# Altium PCB PCB1.PcbDoc
Units mil, origin at the board's own origin, x right, y up, seen from the top; angles counter-clockwise.
Board outline 4200 x 3205 mil, 2 copper layers (Top Layer, Bottom Layer); 8 components, 12 nets, 100 pads, 8 vias.
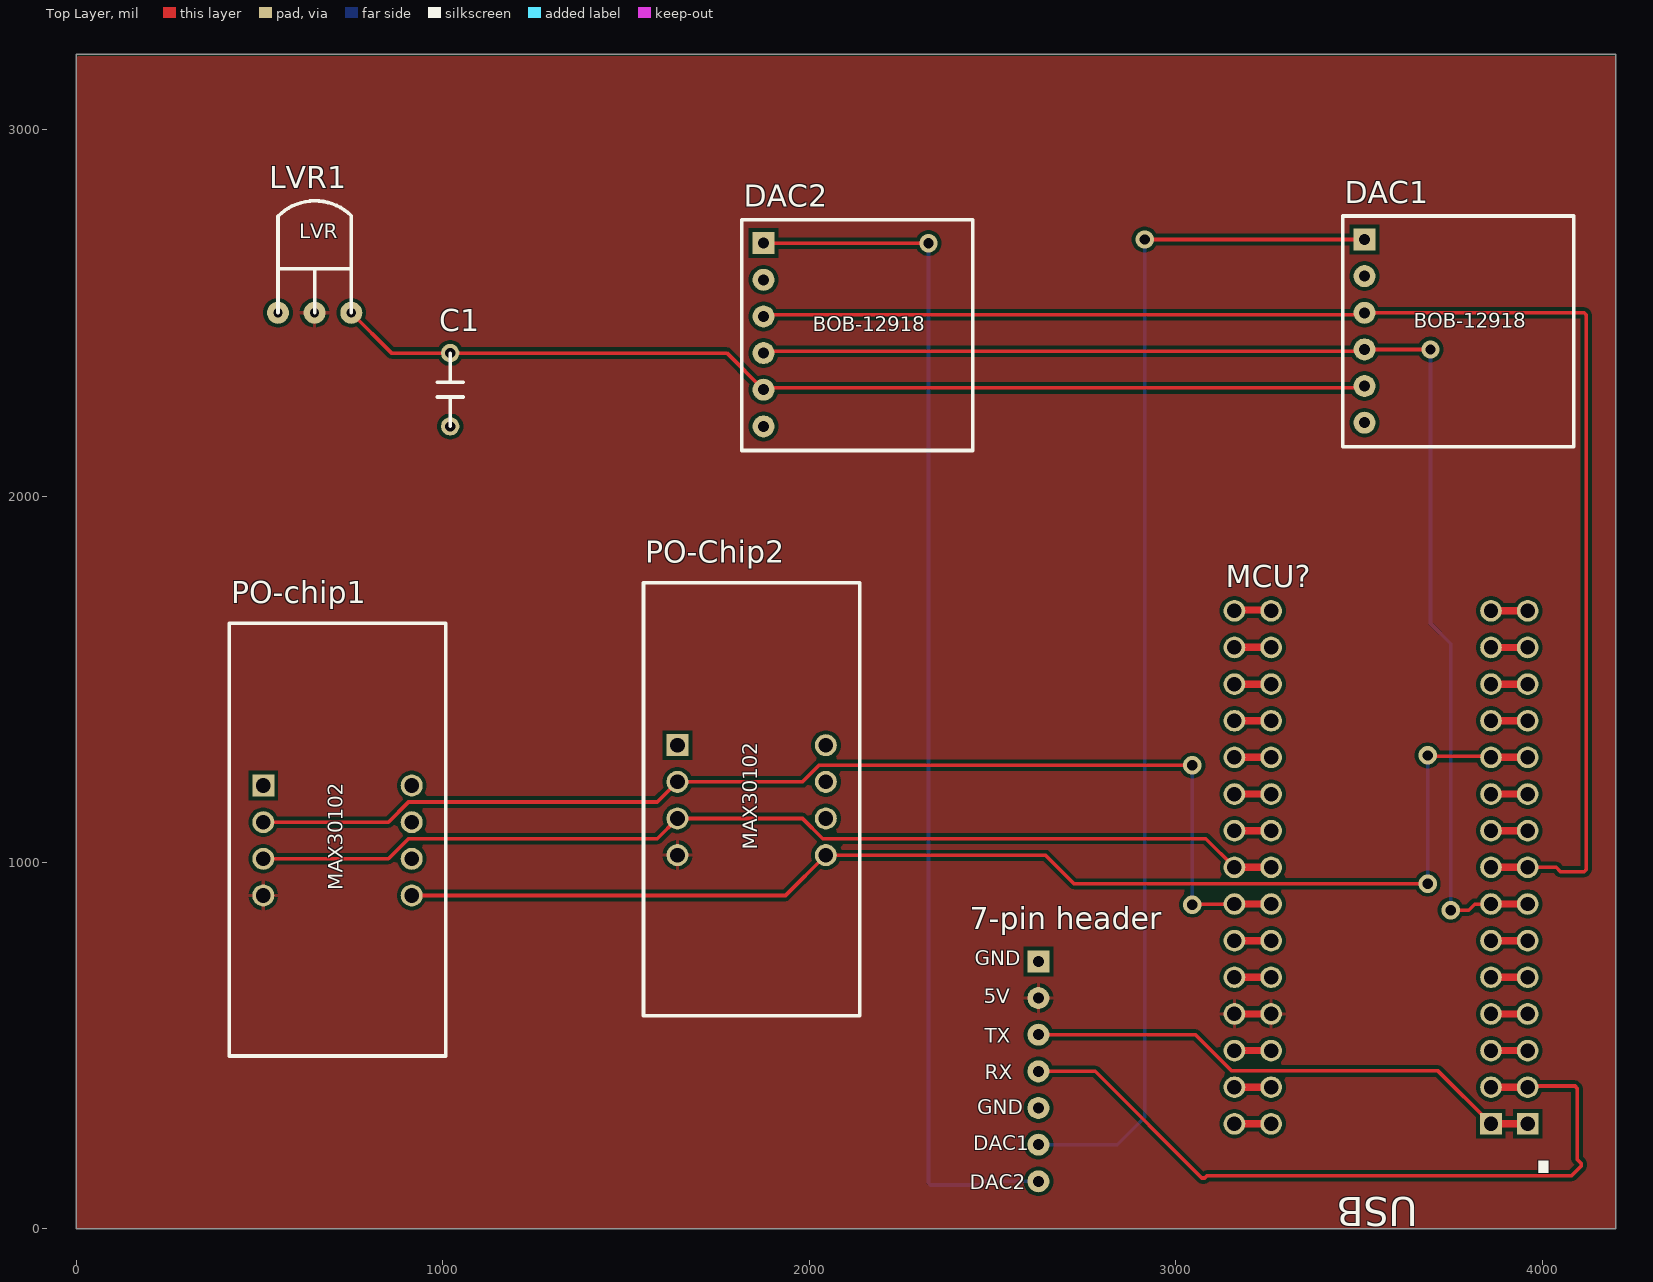
[diagram p0: Top Layer view]
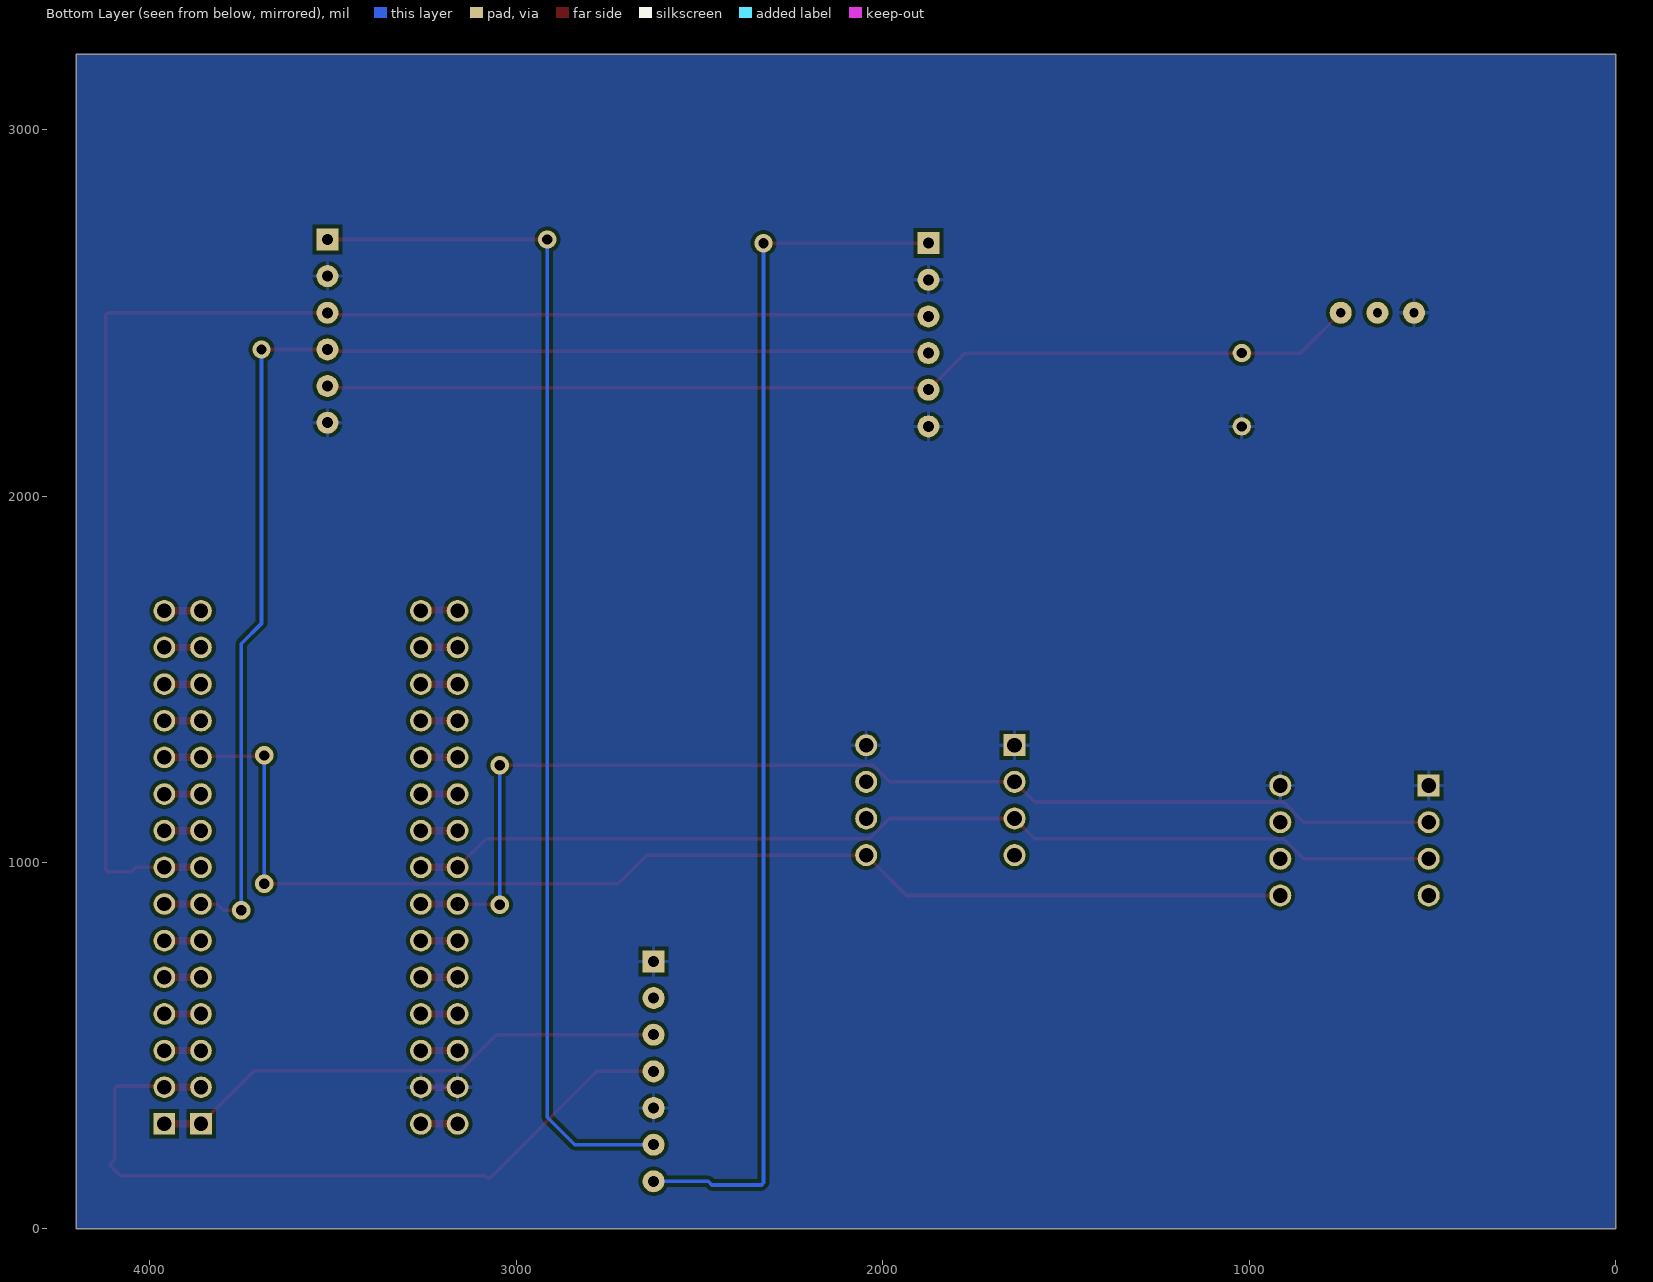
[diagram p1: Bottom Layer view, seen from below]

## Layer stack, top to bottom
Top Solder: solder mask 0.4, Solder Resist, Dk 3.5
Top Layer: signal copper 1.4
Dielectric 1: dielectric 12.6, FR-4, Dk 4.8
Bottom Layer: signal copper 1.4
Bottom Solder: solder mask 0.4, Solder Resist, Dk 3.5

## Board outline
0,0 4200,0 4200,3205 0,3205

## Design rules (kind name [scope] priority, off if disabled: settings)
Clearance [All] p1: gap=10 ignorepadtopadclearanceinfootprint=FALSE
PolygonConnect [All] p1: connectstyle=Relief reliefconductorwidth=10 reliefentries=4 polygonreliefangle="90 Angle" airgapwidth=10
RoutingVias [All] p1: holewidth=28 width=50 viastyle="Through Hole" minholewidth=28 minwidth=50 maxholewidth=28 maxwidth=50
SolderMaskExpansion [All] p1: expansion=4 istentingtop=FALSE
SupplyNets "Schematic Supply Nets" [InNet('GND')] p1: voltage=0.000
Width [All] p1: maxlimit=10 minlimit=10 preferedwidth=10
30 further rules are at their usual default settings.

## Components (designator, comment, footprint, x,y, rotation, side; value= is the part's Value field where it differs from the comment)
"7-pin header" "7-pin header" "7 pin header" 2625,730 r0 top
C1 "Cap-10u" Capacitor 1020,2190 r90 top (schematic designator C?)
DAC1 "BOB-12918" BOB-12918 3455.94,2134.33 r0 top
DAC2 "BOB-12918" BOB-12918 1815.94,2124.33 r0 top
LVR1 "MCP1702-3302E/TO-ND" MCP1702-3302E/TO-ND_1 550,2500 r0 top
MCU? "Nucleo F303K8_FINISHED" Nucleo_Given 3560,986.72 r180 top
PO-chip1 "MAX30102" MAX30102 417.22,471.82 r0 top
PO-Chip2 "MAX30102" MAX30102 1547.22,581.82 r0 top

## Footprints (in the part's own frame and the unit in brackets; to place one, negate y for a bottom-side part, rotate by r counter-clockwise, add the part's x,y. Pads: shape width x height; smd on the part's side, far side on the other; paste and mask are expansions set on the pad)
"7 pin header" [mil]
  rect 60x60 hole 30: 1(0,0)
  round 60 hole 30: 2(0,-100) 3(0,-200) 4(0,-300) 5(0,-400) 6(0,-500) 7(0,-600)
BOB-12918 [mil]
  rect 60x60 hole 30: 1(59.06,565.67)
  round 60 hole 30: 2(59.06,465.67) 3(59.06,365.67) 4(59.06,265.67) 5(59.06,165.67) 6(59.06,65.67)
  silkscreen extent 0,0 630,630
Capacitor [mil] "200 mil"
  round 50 hole 28: 1(0,0) 2(200,0)
  silkscreen extent 0,-35 200,35
MAX30102 [mil]
  rect 60x60 hole 40: 1(92.78,738.19)
  round 60 hole 40: 2(92.78,638.18) 3(92.78,538.18) 4(92.78,438.18) 5(497.78,738.18) 6(497.78,638.18) 7(497.78,538.18) 8(497.78,438.18)
  silkscreen extent 0,0 591,1181
MCP1702-3302E/TO-ND_1 [mil]
  round 60 hole 25: 1(0,0) 2(100,0) 3(200,0)
  silkscreen extent 0,0 200,305
Nucleo_Given [mm] "Nucleo Header"
  rect 1.5x1.5 hole 1: 1(-10.16,17.78) 1(-7.62,17.78)
  round 1.5 hole 1: 2(-10.16,15.24) 2(-7.62,15.24) 3(-10.16,12.7) 3(-7.62,12.7) 4(-10.16,10.16) 4(-7.62,10.16) 5(-10.16,7.62) 5(-7.62,7.62) 6(-10.16,5.08) 6(-7.62,5.08) 7(-10.16,2.54) 7(-7.62,2.54) 8(-10.16,0) 8(-7.62,0) 9(-10.16,-2.54) 9(-7.62,-2.54) 10(-10.16,-5.08) 10(-7.62,-5.08) 11(-10.16,-7.62) 11(-7.62,-7.62) 12(-10.16,-10.16) 12(-7.62,-10.16) 13(-10.16,-12.7) 13(-7.62,-12.7) 14(-10.16,-15.24) 14(-7.62,-15.24) 15(-10.16,-17.78) 15(-7.62,-17.78) 16(7.62,-17.78) 16(10.16,-17.78) 17(7.62,-15.24) 17(10.16,-15.24) 18(7.62,-12.7) 18(10.16,-12.7) 19(7.62,-10.16) 19(10.16,-10.16) 20(7.62,-7.62) 20(10.16,-7.62) 21(7.62,-5.08) 21(10.16,-5.08) 22(7.62,-2.54) 22(10.16,-2.54) 23(7.62,0) 23(10.16,0) 24(7.62,2.54) 24(10.16,2.54) 25(7.62,5.08) 25(10.16,5.08) 26(7.62,7.62) 26(10.16,7.62) 27(7.62,10.16) 27(10.16,10.16) 28(7.62,12.7) 28(10.16,12.7) 29(7.62,15.24) 29(10.16,15.24) 30(7.62,17.78) 30(10.16,17.78)
  Top Layer lines w0.508: 10.262,-17.831 7.722,-17.831 ; 10.16,17.78 7.62,17.78 ; 10.16,15.24 7.62,15.24 ; 10.16,12.7 7.62,12.7 ; 10.16,10.16 7.62,10.16 ; 10.16,7.62 7.62,7.62 ; 10.16,5.08 7.62,5.08 ; 10.16,2.54 7.62,2.54 ; 10.16,0 7.62,0 ; 10.16,-2.54 7.62,-2.54 ; 10.16,-5.08 7.62,-5.08 ; 10.16,-7.62 7.62,-7.62 ; 10.16,-10.16 7.62,-10.16 ; 10.16,-12.7 7.62,-12.7 ; 9.982,-15.265 7.442,-15.265 ; -7.62,17.78 -10.16,17.78 ; -7.62,15.24 -10.16,15.24 ; -7.62,12.7 -10.16,12.7 ; -7.62,10.16 -10.16,10.16 ; -7.62,7.62 -10.16,7.62 ; -7.62,5.08 -10.16,5.08 ; -7.62,2.54 -10.16,2.54 ; -7.62,0 -10.16,0 ; -7.62,-2.54 -10.16,-2.54 ; -7.62,-5.08 -10.16,-5.08 ; -7.62,-7.62 -10.16,-7.62 ; -7.62,-10.16 -10.16,-10.16 ; -7.62,-12.7 -10.16,-12.7 ; -7.62,-15.24 -10.16,-15.24 ; -7.62,-17.78 -10.16,-17.78

## Part data
C1: Capacitance=10µF, Manufacturer="TDK Corporation", Manufacturer Part Number=FK26X7R1C106K, Operating Temperature="-55°C ~ 125°C", Package / Case=Radial, Ratings=-, Supplier Part Number 1=445-8549-ND, Temperature Coefficient=X7R, Tolerance=±10%, Voltage - Rated=16V, Applications="General Purpose", Category=Capacitors, ComponentLink1Description=https://product.tdk.com/info/en/documents/catalog/leadmlcc_conventional_fk_en.pdf, ComponentLink1URL=https://product.tdk.com/info/en/documents/catalog/leadmlcc_conventional_fk_en.pdf, Features=-, Height - Seated (Max)="0.236\" (6.00mm)", Lead Spacing="0.197\" (5.00mm)", Lead Style="Formed Leads - Kinked", Mounting Type="Through Hole", Packaging=Bulk, Pricing 1="1=0.45, 10=0.319, 100=0.2101, 250=0.17896, 500=0.1556, 1000=0.13226, 5000=0.1167, 10000=0.10892, 25000=0.10503 (USD)", RoHS="RoHS Compliant", Size / Dimension="0.217\" L x 0.138\" W (5.50mm x 3.50mm)", Stock 1=7933, Supplier 1=Digi-Key, Thickness (Max)=-
MCU?: "Nucleo F303K8", Current Rating=3A, Insulation Color=Black, Manufacturer="Sullins Connector Solutions", Manufacturer Part Number=PPTC151LFBN-RC, Material Flammability Rating="UL94 V-0", Operating Temperature="-40°C ~ 105°C", Supplier Part Number 1=S7013-ND, Voltage Rating=250V, Applications=-, Category="Connectors, Interconnects", ComponentLink1Description=http://www.sullinscorp.com/drawings/78_P(N)PxCxxxLFBN-RC,_10492-H.pdf, ComponentLink1URL=http://www.sullinscorp.com/drawings/78_P(N)PxCxxxLFBN-RC,_10492-H.pdf, Connector Type=Header, Contact Finish - Mating=Tin, Contact Finish - Post=Tin, Contact Finish Thickness - Mating=-, Contact Finish Thickness - Post=-, Contact Length - Post="0.126\" (3.20mm)", Contact Material="Phosphor Bronze", Contact Shape=Square, Contact Type="Female Socket", Fastening Type=Push-Pull, Features=-, Ingress Protection=-, Insulation Height="0.335\" (8.51mm)", Insulation Material=Polyester, Mated Stacking Heights=-, Mounting Type="Through Hole", Number of Positions=15, Number of Positions Loaded=All, Number of Rows=1, Packaging=Bulk, Part Status=Active, Pitch - Mating="0.100\" (2.54mm)", Pricing 1="1=1.22, 10=1.013, 25=0.9376, 50=0.8438, 100=0.75, 250=0.65624, 500=0.6, 1000=0.54375, 2500=0.4875 (USD)", RoHS="RoHS Compliant", Row Spacing - Mating=-, Stock 1=2938, Style="Board to Board", Supplier 1=Digi-Key, Termination=Solder

## Via types
v1: diameter 50, hole 28, Top Layer to Bottom Layer, 8 vias

## Nets (pads, with @x,y where several pads share a name; then routed paths per layer and width w, separated by ;. In a path a pad name is that pad's centre, name@x,y a point inside that pad or via, vN(x,y) a via of type N, cw(c..) or ccw(c..) an arc to the next point about the centre after c; other vN are vias at no path point)
5V: "7-pin header.2" LVR1.2 MCU?.27 PO-chip1.4 PO-Chip2.4
A4: MCU?.23 PO-chip1.3 PO-Chip2.3 | length 2750.8
  Top Layer w10: PO-chip1.3 851.36,1010 906.36,1065 1585,1065 PO-Chip2.3 1981.36,1120 2036.36,1065 3081.72,1065 MCU?.23@3160,986.72
A5: MCU?.24 PO-chip1.2 PO-Chip2.2 | length 3098.5
  Top Layer w10: PO-chip1.2 851.36,1110 906.36,1165 1585,1165 PO-Chip2.2 1981.36,1220 2026.36,1265 v1(3045,1265) ; v1(3045,885) 3045.86,885.86 3159.14,885.86 MCU?.24@3160,886.72 ; v1@3045,890 v1@3047.5,887.5
  Bottom Layer w10: v1(3045,885) v1(3045,1265)
A5V: C1.2 DAC1.5 DAC2.5 LVR1.3 | length 2856.1
  Top Layer w10: LVR1.3 860,2390 C1.2 1775,2390 DAC2.5 1880,2295 3510,2295 DAC1.5
D8: MCU?.11 PO-chip1.8 PO-Chip2.8 | length 3383
  Top Layer w10: PO-chip1.8 1935,910 PO-Chip2.8 2644.42,1020 2722.22,942.2 v1(3687.2,942.2) v1@3690,945 ; v1(3687.2,1292.2) 3689.93,1289.46 3857.26,1289.46 MCU?.11@3860,1286.72
  Bottom Layer w10: v1(3687.2,942.2) v1(3687.2,1292.2) v1@3690,1295
GND: "7-pin header.1" "7-pin header.5" C1.1 DAC1.2 DAC1.6 DAC2.2 DAC2.6 LVR1.1 MCU?.29 PO-chip1.1 PO-chip1.5 PO-Chip2.1 PO-Chip2.5
OUTPUT1: "7-pin header.6" DAC1.1 | length 3323.1
  Top Layer w10: 2625,230 2630,225 ; v1(2915,2700) DAC1.1
  Bottom Layer w10: 2625,230 2840,230 2915,305 v1(2915,2700)
OUTPUT2: "7-pin header.7" DAC2.1 | length 3334.9
  Top Layer w10: DAC2.1 v1(2325,2690) v1@2335,2700
  Bottom Layer w10: v1(2325,2690) 2325,125.86 2330.86,120 2466.16,120 2476.16,130 2625,130
RX: "7-pin header.4" MCU?.2 | length 1971
  Top Layer w10: 2625,430 2780,430 3070.86,139.14 3079.14,139.14 3085,145 4080,145 4105.86,170.86 4105.86,179.14 4095,190 4095,384.14 4089.14,390 3963.28,390 MCU?.2@3960,386.72
"To SCL": DAC1.3 DAC2.3 MCU?.8 | length 3932.1
  Top Layer w10: DAC2.3 1880,2495 3510,2495 DAC1.3 4114.14,2500 4120,2494.14 4120,980.86 4114.14,975 4049.57,975 4037.85,986.72 MCU?.8@3960,986.72
"To SDA": DAC1.4 DAC2.4 MCU?.7 | length 3503.9
  Top Layer w10: DAC2.4 1880,2395 3510,2395 DAC1.4 v1(3695,2400) ; v1(3750,870) 3799.24,870 3815.47,886.23 3859.51,886.23 MCU?.7@3860,886.72
  Bottom Layer w10: v1(3695,2400) 3695,1652.09 3750,1597.09 v1(3750,870) v1@3750,860
TX: "7-pin header.3" MCU?.1 | length 1335.8
  Top Layer w10: 2625,530 3053.75,530 3152.5,431.25 3715.47,431.25 MCU?.1@3860,286.72
pads on no net: MCU?.3 MCU?.4 MCU?.5 MCU?.6 MCU?.9 MCU?.10 MCU?.12 MCU?.13 MCU?.14 MCU?.15 MCU?.16 MCU?.17 MCU?.18 MCU?.19 MCU?.20 MCU?.21 MCU?.22 MCU?.25 MCU?.26 MCU?.28 MCU?.30 PO-chip1.6 PO-chip1.7 PO-Chip2.6 PO-Chip2.7

## Polygon pours and split planes (outlines as drawn)
GND on Bottom Layer "5V_Top_Layer" (solid, pour order 1): 0,3205 4195,3205 4200,3200 4200,0 0,0
5V on Top Layer "5V_Top_Layer" (solid, pour order 0): 0,3205 5,3200 4200,3200 4200,0 0,0

## Text inside footprints (layer, text, board x,y; h text height)
"7-pin header": Top Overlay "DAC2" at 2438,109 h39.37; Top Overlay "DAC1" at 2447,215 h39.37; Top Overlay "GND" at 2458,313 h39.37; Top Overlay "RX" at 2479,408 h39.37; Top Overlay "TX" at 2479,508 h39.37; Top Overlay "5V" at 2476,616 h39.37; Top Overlay "GND" at 2452,719 h39.37
LVR1: Top Overlay "LVR" at 608,2704 h39.37
MCU?: Top Overlay "USB" at 3660,86.72 h78.74 r180